# Altium PCB PCB.PcbDoc (part 2 of 2)
Units mm, origin at the board's own origin, x right, y up, seen from the top; angles counter-clockwise.
Board outline 100 x 100.01 mm, 2 copper layers (Top Layer, Bottom Layer); 139 components, 84 nets, 470 pads, 423 vias.
Unrouted connection lines stored in the file: 64.
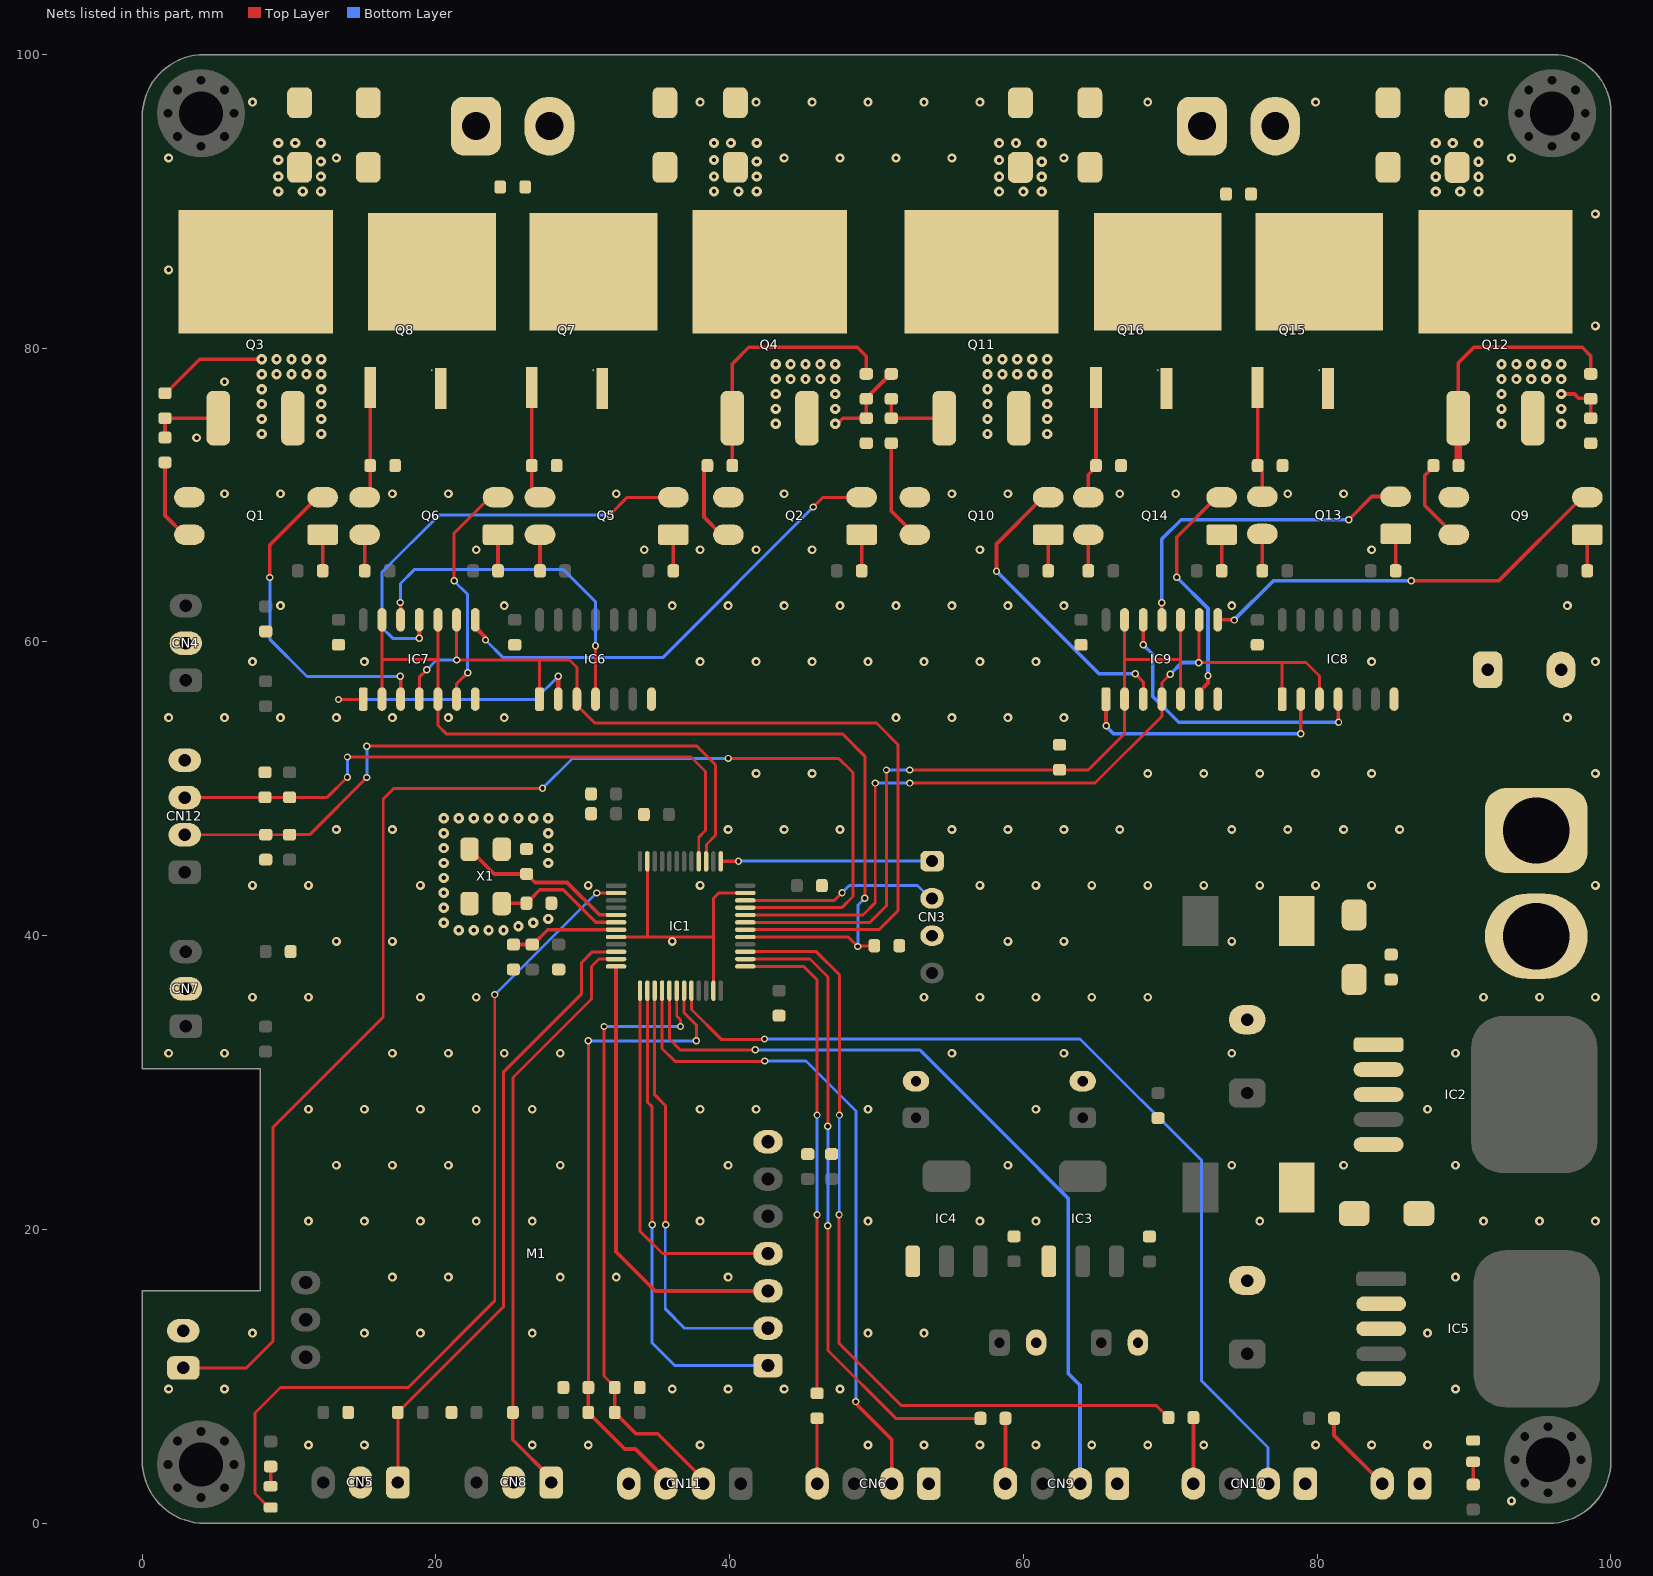
[diagram p2: the nets of this part, all layers, seen from the top]

## Via types
v1: diameter 0.6, hole 0.3, Top Layer to Bottom Layer, tented both sides, 208 vias
v2: diameter 0.7, hole 0.3, Top Layer to Bottom Layer, tented both sides, 142 vias
v3: diameter 0.5, hole 0.3, Top Layer to Bottom Layer, tented both sides, 72 vias
v4: diameter 0.5, hole 0.3, Top Layer to Bottom Layer, 1 vias

## Nets (pads, with @x,y where several pads share a name; then routed paths per layer and width w, separated by ;. In a path a pad name is that pad's centre, name@x,y a point inside that pad or via, vN(x,y) a via of type N, cw(c..) or ccw(c..) an arc to the next point about the centre after c; other vN are vias at no path point) (continued)
GND: C1.2 C2.2 C3.2 C4.2 C5.2 C6.2 C7.2 C8.2 C9.2 C10.2 C11.2 C12.2 C13.2 C14.2 C15.2 C16.2 C17.2 C18.2 C19.2 C20.2 C21.2 C22.2 C23.2 C24.2 C25.2 C26.2 C27.2 C28.2 C29.2 C30.2 C31.2 C32.2 C34.2 C35.2 C36.2 CN1.1 CN2.2 CN3.3 CN4.2 CN5.2 CN6.1 CN7.2 CN8.2 CN9.1 CN10.1 CN11.4 CN12.4 CN13.2 D1.1 D2.1 D5.1 D6.1 D9.1 D10.1 IC1.8 IC1.23 IC1.35 IC1.47 IC2.3 IC2.5 IC3.1 IC4.1 IC5.3 IC5.5 IC6.7 IC7.7 IC8.7 IC9.7 LED2.2 M1.7 Q1.3 Q2.3 Q7.2 Q8.2 Q9.3 Q10.3 Q15.2 Q16.2 R2.2 R27.1 R28.1 R29.1 R40.1 R41.1 R42.1 X1.2 X1.4 | length 20.4
  Top Layer w0.2: IC1.8@32.261,39.91 34.389,39.91 ; IC1.47@34.393,45.06 34.393,39.915 34.389,39.91 ; IC1.23@38.893,36.26 38.893,39.898 ; IC1.35@41.061,42.91 39.253,42.91 38.893,42.551 38.893,39.898 ; 34.389,39.91 38.881,39.91 38.893,39.898
  other v1: 93.232,1.514 11.317,5.324 15.127,5.324 26.557,5.324 30.367,5.324 37.987,5.324 49.417,5.324 53.227,5.324 57.037,5.324 60.847,5.324 64.657,5.324 68.467,5.324 72.277,5.324 79.897,5.324 83.707,5.324 87.517,5.324 1.792,9.134 5.602,9.134 36.082,9.134 39.892,9.134 43.702,9.134 47.512,9.134 89.422,9.134 7.507,12.944 15.127,12.944 18.937,12.944 26.557,12.944 49.417,12.944 53.227,12.944 87.517,12.944 17.032,16.754 20.842,16.754 28.462,16.754 32.272,16.754 39.892,16.754 89.422,16.754 11.317,20.564 15.127,20.564 18.937,20.564 22.747,20.564 26.557,20.564 37.987,20.564 49.417,20.564 57.037,20.564 60.847,20.564 76.087,20.564 91.327,20.564 95.137,20.564 98.947,20.564 13.222,24.374 17.032,24.374 20.842,24.374 28.462,24.374 39.892,24.374 58.942,24.374 74.182,24.374 81.802,24.374 89.422,24.374 11.317,28.184 15.127,28.184 18.937,28.184 22.747,28.184 26.557,28.184 37.987,28.184 41.797,28.184 49.417,28.184 60.847,28.184 87.517,28.184 1.792,31.994 5.602,31.994 17.032,31.994 20.842,31.994 24.652,31.994 28.462,31.994 55.132,31.994 62.752,31.994 74.182,31.994 89.422,31.994 7.507,35.804 11.317,35.804 18.937,35.804 22.747,35.804 53.227,35.804 57.037,35.804 60.847,35.804 64.657,35.804 68.467,35.804 91.327,35.804 95.137,35.804 98.947,35.804 13.222,39.614 17.032,39.614 36.082,39.614 58.942,39.614 62.752,39.614 74.182,39.614 7.507,43.424 11.317,43.424 18.937,43.424 30.367,43.424 37.987,43.424 57.037,43.424 60.847,43.424 64.657,43.424 68.467,43.424 72.277,43.424 76.087,43.424 79.897,43.424 83.707,43.424 98.947,43.424 13.222,47.234 17.032,47.234 39.892,47.234 43.702,47.234 47.512,47.234 55.132,47.234 58.942,47.234 62.752,47.234 66.562,47.234 74.182,47.234 77.992,47.234 81.802,47.234 85.612,47.234 41.797,51.044 45.607,51.044 68.467,51.044 72.277,51.044 76.087,51.044 79.897,51.044 83.707,51.044 98.947,51.044 1.792,54.854 5.602,54.854 9.412,54.854 13.222,54.854 17.032,54.854 20.842,54.854 24.652,54.854 51.322,54.854 55.132,54.854 58.942,54.854 62.752,54.854 97.042,54.854 7.507,58.664 15.127,58.664 37.987,58.664 41.797,58.664 45.607,58.664 49.417,58.664 53.227,58.664 57.037,58.664 60.847,58.664 83.707,58.664 98.947,58.664 9.412,62.474 24.652,62.474 36.082,62.474 39.892,62.474 43.702,62.474 47.512,62.474 51.322,62.474 55.132,62.474 58.942,62.474 62.752,62.474 74.182,62.474 97.042,62.474 22.747,66.284 34.177,66.284 37.987,66.284 41.797,66.284 45.607,66.284 57.037,66.284 83.707,66.284 5.602,70.094 9.412,70.094 17.032,70.094 20.842,70.094 32.272,70.094 43.702,70.094 55.132,70.094 58.942,70.094 66.562,70.094 70.372,70.094 77.992,70.094 81.802,70.094 3.697,73.904 5.602,77.714 98.947,81.524 1.792,85.334 98.947,89.144 1.792,92.954 13.222,92.954 43.702,92.954 47.512,92.954 51.322,92.954 55.132,92.954 62.752,92.954 93.232,92.954 7.507,96.764 37.987,96.764 41.797,96.764 45.607,96.764 49.417,96.764 53.227,96.764 57.037,96.764 68.467,96.764 79.897,96.764 91.327,96.764
  other v2: 21.548,40.381 22.564,40.381 23.58,40.381 24.596,40.381 25.612,40.635 20.532,40.889 26.628,40.889 27.644,41.143 20.532,41.905 20.532,42.921 20.532,43.937 20.532,44.953 27.644,44.953 20.532,45.969 27.644,45.969 20.532,46.985 27.644,46.985 20.532,48.001 21.548,48.001 22.564,48.001 23.58,48.001 24.596,48.001 25.612,48.001 26.628,48.001 27.644,48.001
HS-1: IC7.3 Q1.2 | length 22.9
  Top Layer w0.25: v3(8.687,64.389) 8.687,66.6 11.937,69.85 Q1.2@12.287,69.85 ; v3(17.577,57.658) 17.593,57.642 IC7.3@17.593,56.11
  Bottom Layer w0.2: v3(8.687,64.389) 8.687,60.181 11.21,57.658 v3(17.577,57.658)
HS-2: IC7.8 Q2.2 | length 32.3
  Top Layer w0.2: v3(45.695,69.19) 46.355,69.85 Q2.2@48.99,69.85
  Top Layer w0.3: IC7.8@22.673,61.51 22.673,61.01 23.373,60.31 v3(23.373,60.137)
  Bottom Layer w0.2: v3(23.373,60.137) 24.578,58.931 35.436,58.931 v3(45.695,69.19)
HS-3: IC9.3 Q10.2 | length 21
  Top Layer w0.2: v3(67.615,57.836) 68.166,57.285 68.166,56.118 IC9.3@68.158,56.11
  Top Layer w0.25: v3(58.166,64.821) 58.166,66.676 61.34,69.85 Q10.2@61.69,69.85
  Bottom Layer w0.25: v3(58.166,64.821) 65.151,57.836 v3(67.615,57.836)
HS-4: IC9.8 Q9.2 | length 28.6
  Top Layer w0.25: IC9.8@73.238,61.51 74.33,61.51 v3(74.346,61.493) ; v3(86.411,64.16) 92.353,64.16 98.043,69.85 Q9.2@98.393,69.85
  Bottom Layer w0.25: v3(74.346,61.493) 77.013,64.16 v3(86.411,64.16)
K1: CN6.2 IC1.16 | length 45.4
  Top Layer w0.2: IC1.16@35.393,36.26 35.393,32.323 36.271,31.445 42.367,31.445 v3(42.393,31.471)
  Top Layer w0.25: v3@48.438,8.28 51.029,5.69 CN6.2@51.029,2.692
  Bottom Layer w0.2: v3(42.393,31.471) 45.187,31.471 48.59,28.067 v3(48.59,8.28)
K2: CN9.2 IC1.17 | length 54.7
  Top Layer w0.2: IC1.17@35.893,36.26 35.893,32.966 36.652,32.207 41.707,32.207 v3(41.732,32.233)
  Bottom Layer w0.2: v3(41.732,32.233) 52.934,32.233 59.131,26.035
  Bottom Layer w0.25: 59.131,26.035 63.043,22.123 63.043,10.211 63.856,9.398 CN9.2@63.856,2.692
K3: CN10.2 IC1.20 | length 64.2
  Top Layer w0.2: IC1.20@37.393,36.26 37.393,34.972 39.421,32.944 42.342,32.944 v3(42.367,32.969)
  Bottom Layer w0.2: v3(42.367,32.969) 63.855,32.969 72.136,24.688 72.136,9.677 76.657,5.156 CN10.2@76.657,2.692
LK1: IC1.25 R9.1 | length 33.4
  Top Layer w0.2: IC1.25@41.061,37.91 45.046,37.91 45.949,37.008 v3(45.949,27.788) ; R9.1@45.949,8.837 v3(45.949,21.006)
  Bottom Layer w0.2: v3(45.949,21.006) v3(45.949,27.788)
LK2: IC1.26 R10.1 | length 43.9
  Top Layer w0.2: IC1.26@41.061,38.41 45.461,38.41 46.685,37.186 v3(46.685,27.026) ; v3(46.685,20.244) 46.685,11.76 51.308,7.137 R10.1@57.076,7.137
  Bottom Layer w0.2: v3(46.685,20.244) v3(46.685,27.026)
LK3: IC1.27 R11.1 | length 56.7
  Top Layer w0.2: IC1.27@41.061,38.91 45.9,38.91 47.473,37.338 v3(47.473,27.788) ; v3(47.447,21.006) 47.447,12.243 51.689,8.001 69.064,8.001 R11.1@69.877,7.188
  Bottom Layer w0.2: v3(47.447,21.006) 47.46,21.018 47.46,27.758 v3@47.473,27.771
LS-1: IC7.6 Q6.2 | length 16
  Top Layer w0.2: v3(21.234,64.16) 21.234,67.412 23.673,69.85 Q6.2@24.225,69.85 ; IC7.6@21.403,56.11 21.403,57.155 v3(22.159,57.911)
  Bottom Layer w0.2: v3(21.234,64.16) 22.159,63.236 v3(22.159,57.911)
LS-2: IC7.11 Q5.2 | length 29.8
  Top Layer w0.2: v3(31.826,68.656) 33.02,69.85 Q5.2@36.163,69.85
  Top Layer w0.3: IC7.11@18.863,61.51 18.863,60.258 v3(18.872,60.249)
  Bottom Layer w0.2: v3(18.872,60.249) 17.051,60.249 16.323,60.977 16.323,64.761 20.218,68.656 v3(31.826,68.656)
LS-3: IC9.6 Q14.2 | length 16.3
  Top Layer w0.25: v3(70.434,64.414) 70.434,67.133 73.151,69.85 Q14.2@73.501,69.85 ; IC9.6@71.968,56.11 71.968,56.61 72.568,57.21 v3(72.568,57.709)
  Bottom Layer w0.25: v3(70.434,64.414) 72.568,62.281 v3(72.568,57.709)
LS-4: IC9.11 Q13.2 | length 22.6
  Top Layer w0.25: v3(69.418,62.662) 69.418,62.636 69.428,62.627 IC9.11@69.428,61.51 ; v3(82.144,68.326) 83.718,69.901 Q13.2@85.346,69.901
  Bottom Layer w0.25: v3(69.418,62.662) 69.418,67.005 70.739,68.326 v3(82.144,68.326)
M0: IC1.14 M1.1 | length 32.6
  Top Layer w0.2: IC1.14@34.393,36.26 34.393,28.675 34.722,28.346 v3(34.722,20.32)
  Bottom Layer w0.2: v3(34.722,20.32) 34.722,12.268 36.257,10.733 M1.1@42.605,10.733
M1: IC1.15 M1.2 | length 29.5
  Top Layer w0.2: IC1.15@34.893,36.26 34.893,29.165 35.636,28.422 v3(35.636,20.32)
  Bottom Layer w0.2: v3(35.636,20.32) 35.611,20.295 35.611,14.593 36.931,13.273 M1.2@42.605,13.273
NetC33_1: C33.1 CN14.2 D4.1 D6.2 Q4.2 Q7.3
NetC33_2: C33.2 CN14.1 D3.1 D5.2 Q3. Q8.3
NetC37_1: C37.1 CN15.2 D8.1 D10.2 Q12.2 Q15.3
NetC37_2: C37.2 CN15.1 D7.1 D9.2 Q11.2 Q16.3
NetCN1_2: CN1.2 R4.2 | length 5.8
  Top Layer w0.25: R4.2@81.151,7.137 81.151,5.976 CN1.2@84.43,2.698
NetCN6_4: CN6.4 R9.2 | length 4.4
  Top Layer w0.2: CN6.4@45.949,2.692 R9.2@45.949,7.137
NetCN9_4: CN9.4 R10.2 | length 4.4
  Top Layer w0.25: CN9.4@58.776,2.692 R10.2@58.776,7.137
NetCN10_4: CN10.4 R11.2 | length 4.5
  Top Layer w0.25: CN10.4@71.577,2.692 R11.2@71.577,7.188
NetD1_2: D1.2 IC2.2 L1.1
NetD2_2: D2.2 IC5.2 L2.1
NetLED1_1: LED1.1 R1.2 | length 1.3
  Top Layer w0.25: LED1.1@8.744,2.513 R1.2@8.744,3.859
NetLED2_1: LED2.1 R16.1 | length 1.5
  Top Layer w0.25: R16.1@90.625,2.628 LED2.1@90.625,4.177
NetQ1_1: Q1.1 R19.1 | length 2.5
  Top Layer w0.25: R19.1@12.287,64.846 Q1.1@12.287,67.31
NetQ1_4: Q1.4 R20.1 | length 5.8
  Top Layer w0.25: R20.1@1.549,72.226 1.549,68.618 2.857,67.31 Q1.4@3.207,67.31
NetQ2_1: Q2.1 R22.2 | length 2.5
  Top Layer w0.25: R22.2@48.99,64.846 Q2.1@48.99,67.31
NetQ2_4: Q2.4 R21.2 | length 5.8
  Top Layer w0.25: R21.2@38.481,72.009 38.252,71.78 38.252,68.504 39.446,67.31 Q2.4@39.91,67.31
NetQ3_1: Q3.1 R17.1 R20.2 | length 4.9
  Top Layer w0.25: R20.2@1.549,73.926 R17.1@1.549,75.237 Q3.1@5.182,75.237
NetQ4_1: Q4.1 R18.1 R21.1 | length 18
  Top Layer w0.25: R21.1@40.181,72.009 40.181,75.235 Q4.1@40.182,75.237 40.182,78.943 41.3,80.061 48.692,80.061 49.301,79.451 R18.1@49.301,78.256
NetQ5_1: Q5.1 R24.2 | length 2.5
  Top Layer w0.25: R24.2@36.163,64.846 Q5.1@36.163,67.31
NetQ5_3: Q5.3 Q7.1 R28.2 | length 7.7
  Top Layer w0.25: R28.2@26.522,72 Q7.1@26.522,77.317 ; R28.2@26.522,72.009 26.522,70.377 27.049,69.85 Q5.3@27.083,69.85
NetQ5_4: Q5.4 R23.1 | length 2.5
  Top Layer w0.25: R23.1@27.083,64.846 Q5.4@27.083,67.31
NetQ6_1: Q6.1 R25.1 | length 2.5
  Top Layer w0.25: R25.1@24.225,64.846 Q6.1@24.225,67.31
NetQ6_3: Q6.3 Q8.1 R27.2 | length 7.6
  Top Layer w0.25: Q6.3@15.145,69.85 15.522,70.227 R27.2@15.522,72.009 Q8.1@15.522,77.317
NetQ6_4: Q6.4 R26.1 | length 2.5
  Top Layer w0.25: R26.1@15.145,64.846 Q6.4@15.145,67.31
NetQ9_1: Q9.1 R35.2 | length 2.5
  Top Layer w0.25: R35.2@98.393,64.846 Q9.1@98.393,67.31
NetQ9_4: Q9.4 R34.2 | length 5.8
  Top Layer w0.25: R34.2@87.923,72.009 87.923,71.941 87.325,71.344 87.325,69.298 88.745,67.878 88.745,67.837 89.271,67.31 Q9.4@89.313,67.31
NetQ10_1: Q10.1 R32.1 | length 2.5
  Top Layer w0.25: R32.1@61.69,64.846 Q10.1@61.69,67.31
NetQ10_4: Q10.4 R33.1 | length 6.9
  Top Layer w0.25: R33.1@51.003,73.537 51.003,68.917 52.042,67.878 52.042,67.837 52.568,67.31 Q10.4@52.61,67.31
NetQ11_1: Q11.1 R30.1 R33.2 | length 4.9
  Top Layer w0.25: R30.1@51.003,76.556 R33.2@51.003,75.237 Q11.1@54.606,75.237
NetQ12_1: Q12.1 R31.1 R34.1 | length 17.9
  Top Layer w0.25: Q12.1@89.606,75.665 89.606,78.989 90.678,80.061 98.044,80.061 98.628,79.477 R31.1@98.628,78.256
  Top Layer w0.5: Q12.1@89.606,75.665 89.614,75.656 89.614,72.018 R34.1@89.623,72.009
NetQ13_1: Q13.1 R37.2 | length 2.5
  Top Layer w0.25: R37.2@85.346,64.846 Q13.1@85.346,67.361
NetQ13_3: Q13.3 Q15.1 R41.2 | length 7.5
  Top Layer w0.25: Q15.1@75.946,77.317 R41.2@75.946,72.009 75.946,71.918 76.266,71.598 Q13.3@76.266,69.901
NetQ13_4: Q13.4 R36.1 | length 2.5
  Top Layer w0.25: R36.1@76.266,64.846 Q13.4@76.266,67.361
NetQ14_1: Q14.1 R38.1 | length 2.5
  Top Layer w0.25: R38.1@73.501,64.846 Q14.1@73.501,67.31
NetQ14_3: Q14.3 Q16.1 R40.2 | length 7.7
  Top Layer w0.25: Q14.3@64.421,69.85 64.421,71.394 64.946,71.918 R40.2@64.946,72.009 Q16.1@64.946,77.317
NetQ14_4: Q14.4 R39.1 | length 2.5
  Top Layer w0.25: R39.1@64.421,64.846 Q14.4@64.421,67.31
NH: CN2.1 IC1.33 | length 96.5
  Top Layer w0.2: CN2.1@2.794,10.566 7.087,10.566 8.915,12.395 8.915,26.975 16.408,34.468 16.408,49.301 17.145,50.038 v3(27.254,50.038) ; v3(39.903,52.07) 47.422,52.07 48.387,51.105 48.387,42.672 47.625,41.91 IC1.33@41.061,41.91
  Bottom Layer w0.2: v3(27.254,50.038) 29.286,52.07 v3(39.903,52.07)
OSC1: C2.1 IC1.5 X1.1 | length 11.9
  Top Layer w0.25: X1.1@22.283,45.891 22.283,45.818 22.768,45.332 22.842,45.332 23.97,44.204 26.18,44.204 26.495,43.889 26.495,43.879 26.752,43.623 28.922,43.623 31.126,41.42 32.251,41.42 IC1.5@32.261,41.41
OSC2: C5.1 IC1.6 X1.3 | length 9.1
  Top Layer w0.25: X1.3@24.483,42.191 24.501,42.21 C5.1@26.159,42.21 26.159,42.219 26.474,42.535 26.484,42.535 27.072,43.123 28.66,43.123 30.873,40.91 IC1.6@32.261,40.91
OUT1: IC6.2 IC7.1 | length 18.9
  Top Layer w0.2: v3(13.36,56.083) 15.027,56.083 IC7.1@15.053,56.11
  Top Layer w0.3: v3(28.321,57.658) 28.323,57.656 IC6.2@28.323,56.11
  Bottom Layer w0.2: v3(13.36,56.083) 26.746,56.083 v3(28.321,57.658)
OUT2: IC6.4 IC7.12 | length 23.7
  Top Layer w0.2: v3(30.861,59.741) 30.862,59.74 30.862,56.111 IC6.4@30.863,56.11
  Top Layer w0.25: v3(17.577,62.687) 17.577,62.662 17.593,62.645 IC7.12@17.593,61.51
  Bottom Layer w0.2: v3(17.577,62.687) 17.577,63.983 18.517,64.922 28.677,64.922 30.861,62.738 v3(30.861,59.741)
OUT3: IC8.2 IC9.1 | length 17.7
  Top Layer w0.25: IC9.1@65.618,56.11 65.626,56.102 65.626,54.313 v3(65.634,54.305) ; IC8.2@78.888,56.11 78.888,53.751 v3(78.892,53.746)
  Bottom Layer w0.25: v3(65.634,54.305) 65.634,54.248 66.135,53.746 v3(78.892,53.746)
OUT4: IC8.4 IC9.12 | length 20.5
  Top Layer w0.25: v3(68.148,59.817) 68.158,59.826 IC9.12@68.158,61.51 ; IC8.4@81.428,56.11 81.443,56.094 81.443,54.549 v3(81.458,54.534)
  Bottom Layer w0.25: v3(68.148,59.817) 68.809,59.157 68.809,56.293 70.568,54.534 v3(81.458,54.534)
PA8: IC1.29 IC7.2 IC7.5 IC7.10 IC7.13 R29.2 | length 68.6
  Top Layer w0.2: IC7.2@16.323,56.11 16.323,58.81 ; IC7.13@16.323,61.51 16.323,58.81 ; IC7.10@20.133,61.51 20.133,58.81 ; IC1.29@41.061,39.91 48.075,39.91 v3(48.717,39.268) 48.743,39.294 49.823,39.294 R29.2@49.848,39.319 ; v3(49.2,42.545) 49.2,52.222 47.676,53.746 20.701,53.746 20.133,54.314 IC7.5@20.133,56.11 20.133,58.81 ; 16.323,58.81 20.133,58.81
  Bottom Layer w0.2: v3(48.717,39.268) 48.743,39.294 48.743,42.083 49.2,42.54 v3(49.2,42.545)
PA9: IC1.30 IC6.1 IC6.3 IC7.4 IC7.9 | length 66.1
  Top Layer w0.2: IC7.4@18.863,56.11 18.863,57.598 v3(19.38,58.115) ; IC7.9@21.403,61.51 21.408,61.505 21.408,58.78 v3(21.412,58.776) 27.053,58.776 ; IC6.1@27.053,56.11 27.053,58.776 ; IC1.30@41.061,40.41 50.164,40.41 51.46,41.707 51.46,53.01 49.987,54.483 30.81,54.483 29.593,55.7 29.593,58.265 29.083,58.776 27.053,58.776
  Bottom Layer w0.2: v3(19.38,58.115) 20.041,58.776 v3(21.412,58.776)
PA10: IC1.31 IC9.2 IC9.5 IC9.10 IC9.13 R42.2 | length 53.6
  Top Layer w0.2: IC1.31@41.061,40.91 49.546,40.91 50.673,42.037 v3(50.673,51.283) ; v3(52.248,51.283) 52.255,51.289 62.528,51.289 R42.2@62.535,51.283 ; R42.2@62.459,51.296 64.428,51.296 66.888,53.756 66.888,55.635 IC9.2@66.888,56.11 66.888,58.81 ; IC9.13@66.888,61.51 66.888,58.81 ; IC9.5@70.698,56.11 70.698,58.81 ; IC9.10@70.698,61.51 70.698,58.81 ; 66.888,58.81 70.698,58.81
  Bottom Layer w0.2: v3(50.673,51.283) v3(52.248,51.283)
PA11: IC1.32 IC8.1 IC8.3 IC9.4 IC9.9 | length 59.7
  Top Layer w0.2: IC1.32@41.061,41.41 49.081,41.41 49.911,42.24 v3(49.911,50.394) ; v3(52.248,50.394) 64.872,50.394 69.428,54.95 IC9.4@69.428,56.11 69.428,57.236 v3(70.002,57.81) ; v3(71.933,58.598) v3@71.963,58.628 ; IC9.9@71.968,61.51 71.95,61.492 71.95,58.641 v3@71.963,58.628 ; IC8.1@77.618,56.11 77.618,58.595 77.615,58.598 ; IC8.3@80.158,56.11 80.158,57.688 79.248,58.598 77.615,58.598 ; v3@71.963,58.628 71.993,58.598 77.615,58.598
  Bottom Layer w0.2: v3(49.911,50.394) v3(52.248,50.394)
  Bottom Layer w0.25: v3(70.002,57.81) 70.79,58.598 v3(71.933,58.598)
PB0: C8.1 CN11.2 IC1.18 R12.1 | length 42.6
  Top Layer w0.2: v3(31.445,33.817) 31.445,10.012 32.17,9.287 C8.1@32.17,9.237 ; IC1.18@36.393,36.26 36.393,34.533 36.652,34.274 v3(36.652,33.817)
  Top Layer w0.25: C8.1@32.17,9.237 R12.1@32.17,7.537 32.17,7.528 32.439,7.259 32.449,7.259 33.615,6.092 35.106,6.092 38.202,2.997 CN11.2@38.202,2.692
  Bottom Layer w0.2: v3@31.434,33.817 v3(36.652,33.817)
PB1: C9.1 CN11.3 IC1.19 R13.1 | length 43.7
  Top Layer w0.2: C9.1@30.377,9.237 30.377,32.688 v3@30.378,32.69 ; IC1.19@36.893,36.26 36.893,34.76 37.744,33.909 37.744,32.868 v3(37.719,32.842)
  Top Layer w0.25: C9.1@30.377,9.237 30.373,9.234 30.373,7.541 R13.1@30.369,7.537 30.369,7.528 30.685,7.212 30.694,7.212 32.852,5.055 33.579,5.055 35.662,2.972 CN11.3@35.662,2.692
  Bottom Layer w0.2: v3(30.378,32.842) v3(37.719,32.842)
PB3: C10.1 CN12.2 IC1.39 R14.1 | length 47.3
  Top Layer w0.2: CN12.2@2.894,46.87 2.9,46.876 10.027,46.876 R14.1@10.033,46.882 11.398,46.882 v3(15.291,50.775) ; v3(15.291,52.908) 37.77,52.908 39.04,51.638 39.04,46.838 38.412,46.21 38.412,45.079 IC1.39@38.393,45.06
  Bottom Layer w0.2: v3(15.291,50.775) v3(15.291,52.908)
PB4: C11.1 CN12.3 IC1.40 R15.1 | length 44.1
  Top Layer w0.2: CN12.3@2.894,49.41 2.9,49.417 10.026,49.417 R15.1@10.033,49.424 12.594,49.424 v3(13.97,50.8) ; v3(13.97,52.172) 37.363,52.172 38.354,51.181 38.354,47.168 37.893,46.707 IC1.40@37.893,45.06
  Bottom Layer w0.2: v3(13.97,50.8) v3(13.97,52.172)
PC13: IC1.2 LED1.2 | length 58.4
  Top Layer w0.2: LED1.2@8.744,1.063 8.619,1.063 7.671,2.012 7.671,7.502 9.415,9.246 18.11,9.246 24.003,15.138 v3(24.003,35.992) ; v3(30.937,42.91) IC1.2@32.261,42.91
  Bottom Layer w0.2: v3(24.003,35.992) 24.011,35.992 30.929,42.91 v3(30.937,42.91)
RST: C1.1 IC1.7 R3.1 | length 7.4
  Top Layer w0.25: C1.1@25.274,39.402 R3.1@26.551,39.402 26.601,39.402 27.61,40.41 IC1.7@32.261,40.41
RX2: IC1.13 M1.4 | length 25.7
  Top Layer w0.2: IC1.13@33.893,36.26 33.893,19.879 35.419,18.353 M1.4@42.605,18.353
SWCLK: CN3.1 IC1.37 | length 14.4
  Top Layer w0.25: IC1.37@39.393,45.06 39.413,45.08 v3(40.598,45.08)
  Bottom Layer w0.2: v3(40.598,45.08) CN3.1@53.78,45.08
SWDIO: CN3.2 IC1.34 | length 13.5
  Top Layer w0.2: IC1.34@41.061,42.41 47.135,42.41 v3(47.65,42.926)
  Bottom Layer w0.2: v3(47.65,42.926) 48.143,43.418 52.783,43.418 53.661,42.54 CN3.2@53.78,42.54
TC1: CN5.1 IC1.10 R6.1 | length 43.2
  Top Layer w0.2: CN5.1@17.399,2.769 R6.1@17.399,7.537 24.587,14.726 24.587,30.709 29.896,36.017 29.896,38.151 30.646,38.901 32.251,38.901 IC1.10@32.261,38.91
TC2: CN8.1 IC1.11 R8.1 | length 40.3
  Top Layer w0.2: R8.1@25.236,7.537 25.236,30.341 30.582,35.687 30.582,37.897 31.094,38.409 IC1.11@32.26,38.409
  Top Layer w0.25: R8.1@25.236,7.537 25.236,5.671 27.838,3.069 CN8.1@27.838,2.769
TX2: IC1.12 M1.3 | length 30.9
  Top Layer w0.25: IC1.12@32.261,37.91 32.261,18.489 34.936,15.813 M1.3@42.605,15.813
VBAT: C13.1 C14.1 C30.1 C34.1 CN13.1 D3.2 D4.2 D7.2 D8.2 IC2.1 Q3.3 Q4.3 Q11.3 Q12.3 R17.2 R18.2 R30.2 R31.2 | length 17
  Top Layer w0.25: R17.2@1.549,76.937 1.599,76.937 3.911,79.248 v2(8.128,79.248) ; v2(47.193,74.854) 47.315,74.854 47.698,75.237 C30.1@49.301,75.237 R18.2@49.301,76.556 49.311,76.556 49.58,76.825 49.58,76.883 50.953,78.256 R30.2@51.003,78.256 ; v2(96.617,76.886) 97.516,76.886 97.803,76.599 98.585,76.599 R31.2@98.628,76.556 C34.1@98.628,75.237
  other v2: 8.128,74.168 12.192,74.168 57.552,74.168 61.616,74.168 43.129,74.854 92.553,74.854 96.617,74.854 8.128,75.184 12.192,75.184 57.552,75.184 61.616,75.184 43.129,75.87 47.193,75.87 92.553,75.87 96.617,75.87 8.128,76.2 12.192,76.2 57.552,76.2 61.616,76.2 43.129,76.886 47.193,76.886 92.553,76.886 8.128,77.216 12.192,77.216 57.552,77.216 61.616,77.216 43.129,77.902 44.145,77.902 45.161,77.902 46.177,77.902 47.193,77.902 92.553,77.902 93.569,77.902 94.585,77.902 95.601,77.902 96.617,77.902 8.128,78.232 9.144,78.232 10.16,78.232 11.176,78.232 12.192,78.232 57.552,78.232 58.568,78.232 59.584,78.232 60.6,78.232 61.616,78.232 43.129,78.918 44.145,78.918 45.161,78.918 46.177,78.918 47.193,78.918 92.553,78.918 93.569,78.918 94.585,78.918 95.601,78.918 96.617,78.918 9.144,79.248 10.16,79.248 11.176,79.248 12.192,79.248 57.552,79.248 58.568,79.248 59.584,79.248 60.6,79.248 61.616,79.248 9.263,90.678 10.922,90.678 12.163,90.678 38.933,90.678 40.592,90.678 41.833,90.678 58.342,90.67 60,90.67 61.242,90.67 88.085,90.67 89.744,90.67 90.985,90.67 9.263,91.694 12.163,91.694 38.933,91.694 41.833,91.694 58.342,91.686 61.242,91.686 88.085,91.686 90.985,91.686 61.242,92.709 90.985,92.709 12.163,92.717 41.833,92.717 9.263,92.822 38.933,92.822 58.342,92.814 88.085,92.814 9.263,93.98 10.414,93.98 12.163,93.98 38.933,93.98 40.084,93.98 41.833,93.98 58.342,93.972 59.492,93.972 61.242,93.972 88.085,93.972 89.236,93.972 90.985,93.972
pads on no net: 1. 2. 3. 4. IC1.3 IC1.4 IC1.21 IC1.22 IC1.28 IC1.38 IC1.41 IC1.45 IC1.46 IC2.6 IC5.6 IC6.5 IC6.6 IC6.8 IC6.9 IC6.10 IC6.11 IC6.12 IC6.13 IC8.5 IC8.6 IC8.8 IC8.9 IC8.10 IC8.11 IC8.12 IC8.13 M1.5 M1.8 M1.9 M1.10

## Polygon pours and split planes (outlines as drawn)
GND on Bottom Layer "NONET_L-01_P-001" (solid, pour order 1): 0,4.244 0,15.826 8.025,15.826 8.025,30.937 0,30.937 0,95.768 cw(c4.232,95.768) 4.232,100 96.086,100 cw(c96.086,96.086) 100,96.086 100,4.244 cw(c95.742,4.244) 95.742,-0.014 4.258,-0.014 cw(c4.258,4.244)
GND on Top Layer "NONET_L-01_P-001" (solid, pour order 0): 0,4.244 0,15.826 8.025,15.826 8.025,30.937 0,30.937 0,95.768 cw(c4.232,95.768) 4.232,100 96.086,100 cw(c96.086,96.086) 100,96.086 100,4.244 cw(c95.742,4.244) 95.742,-0.014 4.258,-0.014 cw(c4.258,4.244)

## Keep-outs
Keep-Out Layer:
  lines w0.254: 0,4.244 ccw(c4.258,4.244) 4.258,-0.014 95.742,-0.014 ccw(c95.742,4.244) 100,4.244 100,96.086 ccw(c96.086,96.086) 96.086,100 4.232,100 ccw(c4.232,95.768) 0,95.768 0,32.669 0,30.937 8.025,30.937 8.025,15.826 0,15.826 0,4.244

## Other copper
Top Layer:
  pour cut-out: 90.653,49.378 91.948,50.673 97.892,50.673 98.97,49.595 98.97,44.868 97.815,43.713 92.024,43.713 90.653,45.085
  region net 12V: 82.808,16.133 82.662,16.28 82.662,19.162 83.132,19.632 85.639,19.632 86.062,19.209 86.062,16.28 85.916,16.133 85.812,16.133
  region net 3.3V-REF: 55.116,16.751 55.262,16.898 55.262,19.169 56.387,20.294 56.387,24.387 53.58,27.194 53.58,28.094 53.375,28.299 51.985,28.299 47.519,23.833 43.537,23.833 43.137,24.233 42.074,24.233 41.605,23.764 41.605,23.102 42.074,22.633 43.137,22.633 43.537,23.033 47.503,23.033 48.082,22.454 50.978,22.454 54.262,19.169 54.262,16.898 54.409,16.751 54.512,16.751
  region net 3.3V: 63.133,25.112 63.133,28.094 63.338,28.299 64.728,28.299 64.933,28.094 64.933,25.112 65.501,24.544 62.566,24.544
  region net 3.3V: 64.387,16.751 64.533,16.898 64.533,18.651 65.658,19.776 65.658,24.387 65.344,24.701 62.723,24.701 62.408,24.387 62.408,19.776 63.533,18.651 63.533,16.898 63.68,16.751
  region net 5V: 75.777,12.521 74.296,12.521 73.304,13.513 73.304,21.116 73.27,21.15 73.27,24.57 70.846,24.57 70.846,11.741 69.977,10.871 66.853,10.871 65.98,11.744 65.98,14.486 66.833,15.34 69.03,17.536 69.03,18.226 68.123,18.226 67.448,18.901 65.98,18.901 65.833,18.755 65.833,17.001 64.598,15.766 64.598,11.794 63.676,10.871 59.942,10.871 59.069,11.744 59.069,16.803 59.81,17.544 59.81,18.109 59.693,18.226 58.99,18.226 58.315,18.901 56.709,18.901 56.562,18.755 56.562,10.621 58.09,9.093 75.752,9.093 78.158,6.687 79.734,6.687 79.851,6.805 79.851,12.351 79.68,12.522
  region net 5V: 84.907,12.033 85.769,12.033 86.062,11.741 86.062,11.326 85.769,11.033 82.839,11.033 79.851,8.045 79.851,6.805 79.734,6.687 78.158,6.687 74.325,10.521 73.985,10.861 73.985,12.228 74.278,12.521 82.3,12.521 82.787,12.033 85.769,12.033 86.062,11.741 86.062,11.326 85.769,11.033 83.787,11.033
  region net NetD2_2: 79.826,24.57 82.464,21.932 83.326,21.932 83.575,21.683 83.575,20.481 83.326,20.232 82.513,20.232 81.813,19.533 81.813,16.205 82.585,15.433 85.769,15.433 86.062,15.141 86.062,14.726 85.769,14.433 78.81,14.433 77.402,15.841 77.402,24.57
  region net 12V: 82.353,27.985 81.839,28.499 77.983,28.499 76.192,30.29 74.485,30.29 73.304,31.47 73.304,39.252 73.27,39.286 73.27,42.706 70.846,42.706 70.846,32.213 68.714,30.081 68.714,29.002 68.831,28.884 71.07,28.884 71.664,28.29 73.411,26.543 81.839,26.543 82.28,26.985 85.591,26.985 85.884,27.277 85.884,27.692 85.591,27.985 85.384,27.985
  region net NetD1_2: 79.826,42.706 79.826,39.286 81.044,38.068 83.126,38.068 83.375,37.819 83.375,34.975 81.763,33.363 81.763,31.826 82.204,31.385 85.591,31.385 85.884,31.092 85.884,30.677 85.591,30.385 78.785,30.385 77.402,31.767 77.402,42.706
  region net VBAT: 91.764,79.4 97.632,79.4 97.632,73.387 91.764,73.387
  region net NetC37_1: 83.536,92.912 88.388,97.763 90.136,97.763 90.385,97.514 90.385,95.912 90.136,95.663 88.036,95.663 85.686,93.313 85.686,90.088
  region net NetC37_1: 75.096,90.833 75.446,91.183 75.446,96.127 76.442,97.123 77.85,97.123 78.846,96.127 78.846,94.823 80.298,93.371 85.437,93.371 85.686,93.122 85.686,88.307 85.196,87.817 75.096,87.817
  region net NetC37_2: 74.196,90.75 73.846,91.1 73.846,96.625 73.348,97.123 70.944,97.123 69.071,95.25 62.906,95.25 60.393,97.763 59.191,97.763 58.942,97.514 58.942,95.912 59.191,95.663 60.95,95.663 63.667,92.946 63.667,91.52 63.916,91.271 63.667,91.52 63.667,88.245 64.096,87.817 74.196,87.817
  region net NetC33_2: 23.572,97.123 18.637,97.123 16.764,95.25 14.358,95.25 13.937,95.671 11.837,97.771 10.112,97.771 9.863,97.522 9.863,95.92 10.112,95.671 12.279,95.671 14.537,93.413 14.537,87.952 14.672,87.817 24.772,87.817
  region net NetC33_1: 27.92,97.112 32.502,97.112 34.352,95.262 37.273,95.262 39.782,97.771 40.984,97.771 41.233,97.522 41.233,95.92 40.984,95.671 38.775,95.671 36.433,93.329 36.433,88.477 35.772,87.817 35.705,87.884 27.94,87.884
  region net NetC33_1: 27.018,97.123 26.022,96.127 26.022,91.666 25.672,91.316 25.672,89.217 25.672,87.817 35.772,87.817 35.772,89.217 33.465,89.217 29.422,93.26 29.422,96.127 28.426,97.123
  region net NetC33_2: 23.924,97.123 24.422,96.625 24.422,91.666 24.772,91.316 24.772,88.377 24.815,88.334 24.815,87.859 24.772,87.817 14.672,87.817 14.672,89.217 17.009,89.217 21.022,93.23 21.022,96.625 21.52,97.123
  region net VBAT: 87.458,94.48 87.458,90.162 91.522,90.162 91.522,94.48
  region net VBAT: 57.714,94.48 57.714,90.162 61.778,90.162 61.778,94.48
  region net VBAT: 38.306,94.488 38.306,90.17 42.37,90.17 42.37,94.488
  region net VBAT: 8.636,94.488 8.636,90.17 12.7,90.17 12.7,94.488
  region net VBAT: 56.764,80.112 62.632,80.112 62.632,73.387 56.764,73.387
  region net VBAT: 42.341,79.4 48.208,79.4 48.208,73.387 42.341,73.387
  region net VBAT: 7.341,80.112 13.208,80.112 13.208,73.387 7.341,73.387
  region net NetC37_1: 75.096,89.217 86.696,89.217 86.896,89.417 97.396,89.417 97.396,81.017 86.896,81.017 86.696,81.217 75.096,81.217
  region net NetC37_2: 51.896,89.417 62.396,89.417 62.596,89.217 74.196,89.217 74.196,81.217 62.596,81.217 62.396,81.017 51.896,81.017
  region net NetC33_2: 2.472,89.417 12.972,89.417 13.172,89.217 24.772,89.217 24.772,81.217 13.172,81.217 12.972,81.017 2.472,81.017
  region net NetC33_1: 25.672,89.217 37.272,89.217 37.472,89.417 47.972,89.417 47.972,81.017 37.472,81.017 37.272,81.217 25.672,81.217
  region net VBAT: 98.42,45.11 97.57,44.261 91.55,44.261 89.306,42.018 89.306,35.653 85.738,32.085 82.631,32.085 82.484,32.231 82.484,32.938 84.589,35.043 84.589,37.3 84.706,37.418 85.5,37.418 86.03,37.948 86.03,43.79 92.301,50.061 97.553,50.061 98.42,49.194
Bottom Layer:
  pour cut-out: 90.653,49.378 91.948,50.673 97.892,50.673 98.97,49.595 98.97,44.868 97.815,43.713 92.024,43.713 90.653,45.085
  region net 12V: 74.278,30.29 74.131,30.144 73.985,29.997 73.985,26.548 82.931,17.602 83.134,17.399 85.573,17.399 85.827,17.653 85.827,18.948 77.595,27.18 77.595,28.887 76.192,30.29 75.235,30.29
  region net VBAT: 12.7,73.406 7.36,73.406 7.341,73.387 7.341,88.875 8.636,90.17 8.636,94.488 12.7,94.488 12.7,90.17 13.653,89.217 37.353,89.217 38.306,90.17 38.306,94.488 42.37,94.488 42.37,90.17 43.64,88.9 56.452,88.9 57.714,90.162 57.714,94.48 61.778,94.48 61.778,90.162 63.803,88.138 85.433,88.138 87.458,90.162 87.458,94.48 91.522,94.48 91.522,86.222 97.632,80.112 97.632,73.387 94.742,70.497 94.742,52.872 98.42,49.194 98.42,45.11 97.57,44.261 97.507,44.325 92.206,44.325 91.42,45.11 89.052,47.478 89.052,69.952 85.617,73.387 62.632,73.387 7.341,73.387